# Altium PCB correctCore.PcbDoc (part 2 of 2)
Units mil, origin at the board's own origin, x right, y up, seen from the top; angles counter-clockwise.
Board outline 6000 x 4000 mil, 4 copper layers (Top Layer, Layer 1, Layer 2, Bottom Layer), stack 23.756 mil thick; 90 components, 166 nets, 637 pads, 374 vias.
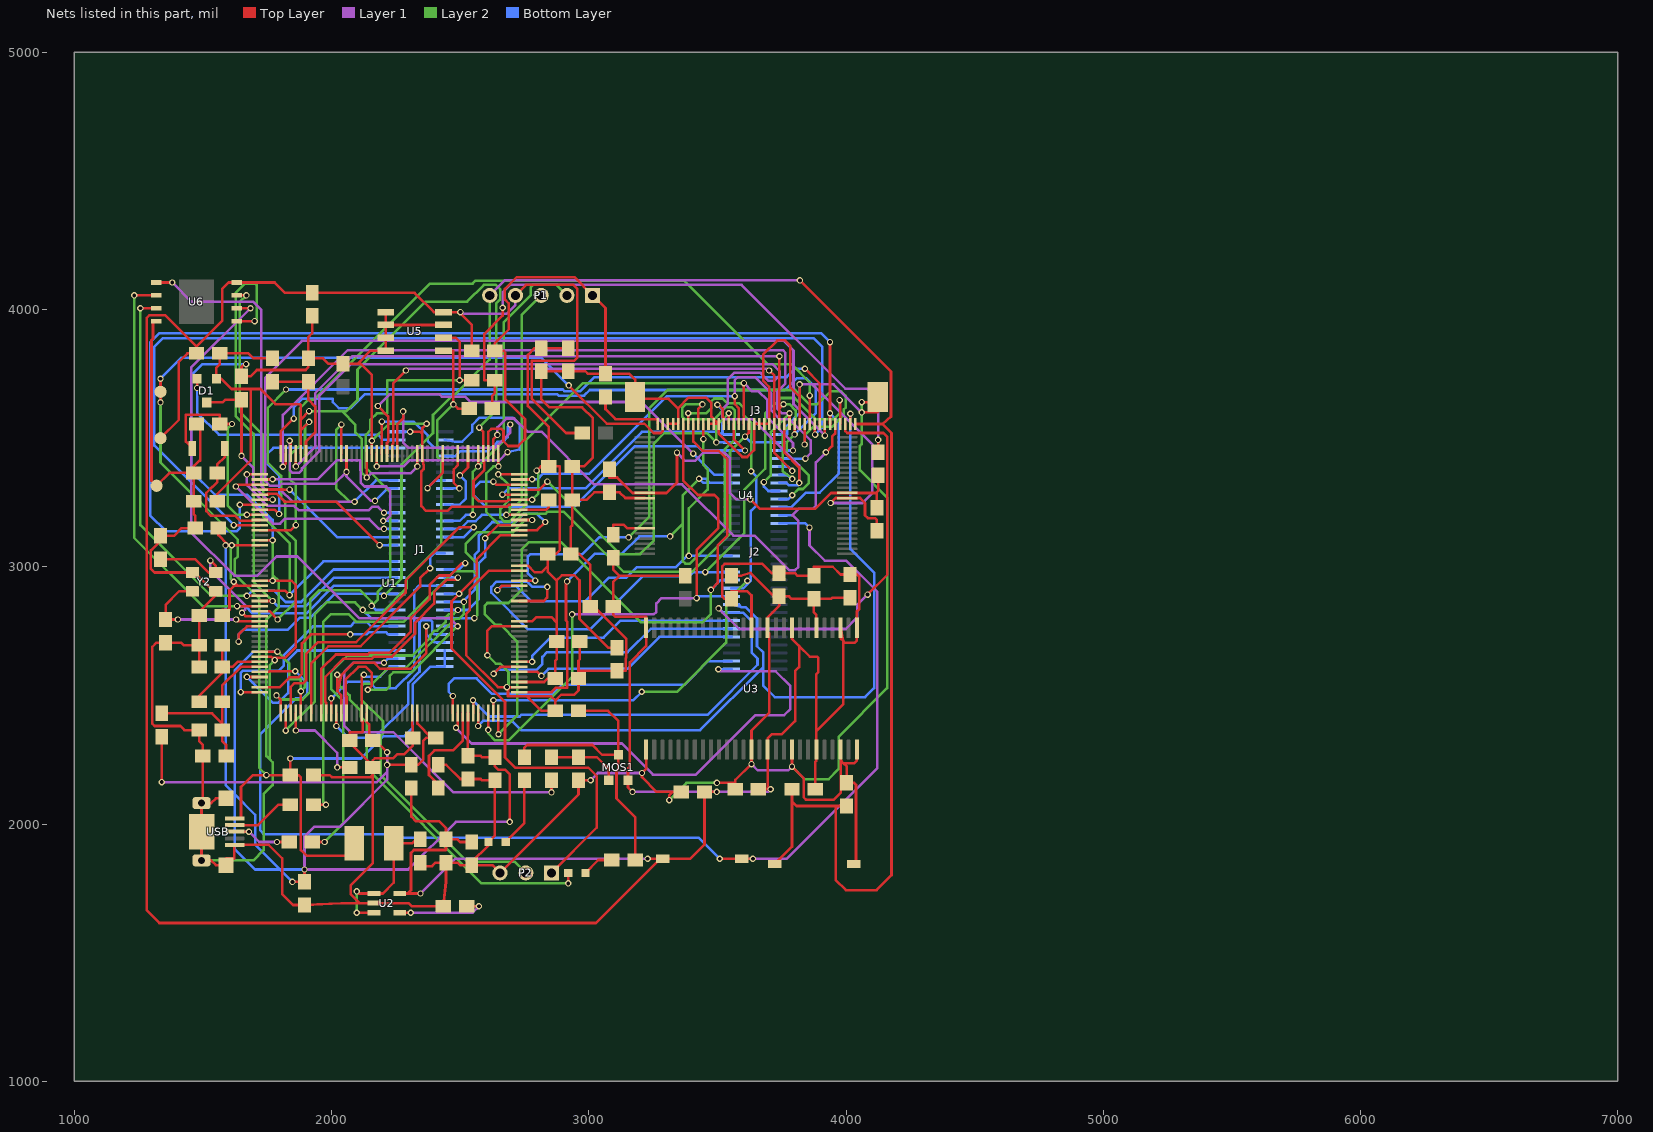
[diagram p4: the nets of this part, all layers, seen from the top]

## Via types
v1: diameter 25, hole 15, Top Layer to Bottom Layer, 374 vias

## Nets (pads, with @x,y where several pads share a name; then routed paths per layer and width w, separated by ;. In a path a pad name is that pad's centre, name@x,y a point inside that pad or via, vN(x,y) a via of type N, cw(c..) or ccw(c..) an arc to the next point about the centre after c; other vN are vias at no path point) (continued)
GND: C1.2 C2.1 C3.2 C4.1 C5.2 C6.1 C7.1 C8.1 C9.1 C10.1 C11.1 C12.2 C13.1 C14.1 C15.1 C16.1 C17.1 C18.1 C19.1 C20.1 C21.1 C22.1 C23.1 C24.1 C25.1 C26.1 C27.1 C28.1 C29.1 C30.1 C31.1 C32.1 C33.2 C34.2 C35.1 C36.1 C37.1 C38.1 C39.1 C40.1 C41.1 C42.1 C43.1 C44.2 C45.2 GND.1 J1.1 J1.30 J2.31 J3.3 J3.4 J3.5 J3.11 J3.12 J3.13 J3.20 J3.21 J3.22 J3.23 J3.29 J3.A J3.B P1.1 P2.3 PWR.2 R1.2 R4.2 R7.2 R14.1 RST.2 U1.14 U1.22 U1.37 U1.61 U1.71 U1.90 U1.102 U1.113 U1.126 U1.135 U1.148 U1.158 U2.2 U3.6 U3.12 U3.28 U3.41 U3.46 U3.52 U3.54 U4.13 U4.36 U5.1 U5.2 U5.3 U5.4 U5.7 U6.4 USB.5 USB.6 USB.7 USB.8 USB.9 Y2.2 Y2.4 | length 29148.7
  Top Layer w10: U6.4@1318.5,3955 1306,3955 1306,3887 1300,3881 1300,3335 GND.1@1320,3315 1370,3365 C9.1@1465,3365 ; C11.1@1334.94,3120 C11.1@1354,3120 ; C8.1@1475,3554.94 1475,3550.47 1489,3550.47 1489,3412 1485,3412 1465,3392 C9.1@1465,3365 ; C4.1@1485,2610.98 C2.1@1485,2695 ; USB.9@1590,2100 1550.78,2100 1532,2081.22 USB.6@1500,2081.22 ; v1(1668,3788) 1662,3788 1650,3776 C1.2@1650,3740 1685,3740 1710,3765 1899.06,3765 1910.06,3776 R4.2@1910.06,3810 ; U1.37@1720.91,2650.31 1765.54,2650.31 1769.85,2646 v1@1779,2646 ; U1.22@1720.91,2945.59 v1(1771,2945.59) 1844.41,2945.59 1861.28,2928.72 1861.28,2687.28 1820,2646 v1@1779,2646 ; U1.14@1720.91,3103.07 1770.93,3103.07 v1(1771,3103) ; v1(1779,2637) v1@1779,2646 ; C44.2@1925,3975 1925,3907.94 1910.06,3893 R4.2@1910.06,3810 ; C33.2@1930,2190 1993,2190 2001,2182 2152,2182 2160,2190 ; v1(2125.99,2580.33) 2117.19,2571.53 U1.61@2117.19,2431.2 2117.19,2399 2120.87,2399 2120.87,2389.13 2122,2388 2122,2359 2120,2357 2070,2357 C16.1@2070,2325 2070,2317 R1.2@2160,2227 ; U1.158@2156.56,3440.29 v1@2156.56,3489.56 ; v1(2157,3490) v1@2156.56,3489.56 ; U5.1@2210.59,3990 U5.2@2210.59,3940 ; v1(2305.41,3524.92) 2344,3524.92 2353.41,3515.52 ; U1.71@2314.04,2431.2 2314.04,2382.96 2315,2382 C17.1@2315,2335 2315,2304 2282,2271 2255,2271 2239.5,2255.5 2168,2255.5 2160,2247.5 R1.2@2160,2227 ; C29.1@2345,1850 2345,1836.5 2390.66,1836.5 2404.16,1850 C31.1@2445,1850 ; v1(2369.41,3556) 2353.41,3540 2353.41,3515.52 ; C3.2@2415.06,2230 2446,2230 2501,2175 C18.1@2530.06,2175 2580,2175 2585,2170 C19.1@2635,2170 2635,1955 PWR.2@2610,1930 2610,1917 2545,1852 C32.1@2545,1840 ; U5.7@2435,3940 U5.2@2210.59,3940 ; v1(2606,2656) 2606,2752 2622.42,2768.42 U1.102@2730,2768.42 ; U1.135@2609.31,3440.29 2609.31,3523.82 2621.5,3536 2660.5,3536 2668.5,3528 2668.5,3488 2687,3469.5 2725.5,3469.5 2752,3496 2752,3574 2676,3650 2676,3832 2668,3840 C45.2@2635,3840 2635,3869 2689,3923 2689,4023.68 2674,4038.68 2674,4080 2720,4126 2944,4126 P1.1@3015,4055 3064.94,4005.06 C28.1@3064.94,3750 ; v1(2682,2532) 2686,2528 v1@2686,2522.2 ; U1.90@2730,2532.2 2696,2532.2 ; U1.113@2730,2984.96 2612,2984.96 2538,2910.96 2538,2832 2523,2817 2523,2656 2646.8,2532.2 2696,2532.2 ; U1.126@2730,3240.87 2689.87,3240.87 2683,3234 2468,3234 2451,3217 2368,3217 2349,3236 2349,3371 2358,3380 2358,3397 2357,3398 2357,3410 2353.41,3410 U1.148@2353.41,3440.29 2353.41,3515.52 ; C21.1@2965,2710.06 2965,2640 2960,2635 2960,2595 ; C39.1@3005,2845 C39.1@3005,2861 ; v1(3007,2170) R14.1@2960,2170 2960,2115 P2.3@2655,1810 2625,1840 C32.1@2545,1840 ; U4.13@3217.6,3267.2 3142.17,3267.2 3120,3289.37 C36.1@3080,3289.37 3021.37,3289.37 2992,3260 C5.2@2935,3260 ; U3.28@3223.07,2290 3223.07,2214.23 v1(3207.07,2198.23) 3207.07,2181.93 3264,2125 3326,2125 ; J3.3@3307.95,3555.57 J3.4@3327.64,3555.57 J3.5@3347.32,3555.57 3347.32,3616 ; v1(3313,2093) 3313,2112 3326,2125 ; C38.1@3360,2125 3326,2125 ; J3.11@3465.43,3555.57 J3.12@3485.12,3555.57 J3.13@3504.8,3555.57 ; v1(3498,2160) 3569.53,2160 ; C40.1@3555,2965 3592,2965 3629.36,2976 3720.36,2885 C41.1@3740.04,2885 ; C37.1@3569.53,2135 3569.53,2160 ; U3.46@3790,2290 v1(3790,2223) 3835,2178 3835,2104 3844,2095 3953,2095 3978.98,2120.98 3978.98,2248 ; J3.29@3819.76,3555.57 3819.76,3661 ; v1(3819.76,3709) 3819.76,3661 ; U3.6@3884.49,2762.44 3884.49,2813 3875,2822.49 C42.1@3875,2875 ; v1(3940,3248) 3959.2,3267.2 U4.36@4005,3267.2 4054.8,3267.2 4074,3248 4074,3200 4085,3189 4112,3189 4120,3181 C35.1@4120,3140 ; U3.52@3978.98,2290 3978.98,2248 ; C43.1@4015.06,2880 3947,2880 3942,2875 C42.1@3875,2875 ; RST.2@4030,1845 4039,1845 4039,2152 4031,2160 C12.2@4002.09,2160 4002.09,2224.89 3990.98,2236 ; U3.54@4041.97,2290 4041.97,2245.97 4032,2236 3990.98,2236 ; v1(4061,3600) 4123.88,3600 J3.B@4123.88,3640 ; v1(4061,3640) J3.B@4123.88,3640 ; J3.B@4123.88,3660 J3.B@4123.88,3640 ; C11.1@1354,3120 1298,3064 1298,2991.83 1312,2977.83 Y2.4@1459.45,2977.83 1468,2977.83 1540.83,2905 Y2.2@1550,2905 1550,2890 1485,2825 C15.1@1485,2810 C2.1@1485,2695 ; C11.1@1354,3120 1387,3120 1417,3150 C14.1@1470,3150 1470,3199 1464.94,3204.06 C13.1@1464.94,3254.94 1464.94,3309 1465,3309.06 C9.1@1465,3365 ; C2.1@1485,2695 1425,2695 1415,2705 C10.1@1355,2705 1320,2705 1303,2688 1303,2390 1312,2381 1412,2381 1428,2365 C7.1@1485,2365 1485,2322 1500,2307 C6.1@1500,2265 USB.6@1500,2081.22 ; USB.6@1500,2081.22 USB.6@1494.65,2081.22 1494.65,2025.35 1495,2025 USB.9@1495,1970 1495,1914.35 1494.65,1914 USB.7@1494.65,1858.78 1532,1858.78 1550.78,1840 USB.8@1590,1840 1590,1866 1622,1866 1622,1918.82 USB.5@1624,1918.82 1756,1918.82 1808,1866.82 1808,1728 1851,1685 C27.1@1895,1685 2037.4,1692.4 2109.6,1692.4 ; R4.2@1910.06,3810 1967,3810 1987,3790 R7.2@2045.06,3790 2102,3790 ; 2102,3790 2112,3790 2156.5,3745.5 2156.5,3517.5 2156.56,3517.44 v1@2156.56,3489.56 ; 2102,3790 2152,3840 U5.4@2210.59,3840 U5.3@2210.59,3890 U5.2@2210.59,3940 ; 2109.6,1692.4 U2.2@2165,1692.4 2300,1692.4 2312.4,1680 C30.1@2435,1680 2445,1775 C31.1@2445,1850 ; 2109.6,1692.4 2074,1728 2074,1761 2160,1847 2160,2190 ; 2160,2190 R1.2@2160,2220 R1.2@2160,2227 ; C31.1@2445,1850 2490,1850 2500,1840 C32.1@2545,1840 ; v1@2686,2522.2 2696,2532.2 ; v1@2686,2522.2 2686,2496 2760,2496 ; 2760,2496 2854,2496 2870,2480 ; 2760,2496 2816,2440 C34.2@2870,2440 2870,2480 ; 2870,2480 2893,2503 2944,2503 2960,2519 C20.1@2960,2565 2960,2595 ; C5.2@2935,3260 C23.1@2935,3390.06 2982.06,3390.06 3016,3424 3016,3578 2974,3620 2848,3620 2815.06,3652.94 C25.1@2815.06,3760 C24.1@2920,3760 2987,3760 2997,3750 C28.1@3064.94,3750 ; C5.2@2935,3260 2935,3160 2930,3155 C22.1@2930,3050 2963,3050 3005,3008 C39.1@3005,2861 ; 2960,2595 C26.1@3110,2595 3143,2595 3143,2644 3146,2647 3146,2720 C39.1@3005,2861 ; C28.1@3064.94,3750 3158,3750 3180,3728 J3.A@3180,3660 3180,3653 3310.32,3653 3347.32,3616 ; 3347.32,3616 3388.46,3657.14 3456,3657.14 3476.5,3636.64 3476.5,3584 3497.59,3562.91 3504.8,3562.91 J3.13@3504.8,3555.57 ; J3.13@3504.8,3555.57 3504.8,3518.7 3596.9,3426.6 3616,3426.6 3642.6,3453.2 J3.20@3642.6,3555.57 J3.21@3662.28,3555.57 J3.22@3681.97,3555.57 J3.23@3701.65,3555.57 3701.65,3699.35 3677.5,3723.5 3677.5,3824.5 3733,3880 3763,3880 3784,3859 3784,3696.76 3819.76,3661 ; 3569.53,2160 3569.53,2171 v1(3632.52,2233) U3.41@3632.52,2290 3632.52,2363 3701.5,2431.98 3701.5,2741.27 3695.51,2741.27 U3.12@3695.51,2762.44 3695.51,2803.47 3740.04,2848 C41.1@3740.04,2885 ; C41.1@3740.04,2885 3778.99,2885 3788.99,2875 C42.1@3875,2875 ; 3978.98,2248 3990.98,2236
  Layer 1 w10: v1(3007,2170) 3035.23,2198.23 v1(3207.07,2198.23) ; v1(3632.52,2233) 3656.52,2209 3776,2209 v1(3790,2223) ; v1(3819.76,3709) 3869,3709 ; v1(3940,3248) 4064,3248 4101.5,3285.5 4101.5,3476.5 3869,3709 ; v1(4061,3600) 3952,3709 3869,3709
  Layer 2 w10: USB.7@1494.65,1858.78 1696,1858.78 1736,1898.78 1736,2116 1771,2151 1771,2240 1759,2252 ; v1(1771,2945.59) 1771,2968 ; v1(1771,3103) 1771,2968 ; v1(1779,2637) 1759,2617 1759,2252 ; v1(2157,3490) 2223,3556 v1(2369.41,3556) ; v1(2606,2656) 2639,2623 2656,2623 2688,2591 2688,2538 v1(2682,2532) ; v1(3313,2093) 3380,2160 v1(3498,2160) ; v1(3790,2223) 3839,2174 3932,2174 3971,2213 3971,2339 4160,2528 4160,3270 4054,3376 4054,3470 4061,3477 v1(4061,3600) v1(4061,3640) ; 1759,2252 1747,2264 1747,2795 1795,2843 1795,2944 1771,2968
  Bottom Layer w10: v1(1668,3788) 1498,3788 1454,3744 1454,3373 1547,3280 1673,3280 1771,3182 v1(1771,3103) ; v1(2125.99,2580.33) 2133.19,2573.14 2189.1,2573.14 2227.5,2611.54 J1.1@2254.96,2611.54 ; J1.30@2254.96,3524.92 v1(2305.41,3524.92) ; J2.31@3740.04,3514.92 3770.76,3514.92 3770.76,3548 3819.76,3597 v1(3819.76,3709)
IIC_SCL: J1.8 R20.1 U1.45 U5.6 | length 2530.7
  Top Layer w10: v1(1786,2500) 1802.22,2483.78 U1.45@1802.22,2431.2 ; U5.6@2435,3890 2483,3890 2498,3875 v1(2498,3725) R20.1@2545,3725
  Layer 2 w10: v1(1786,2500) 1802,2484 1888,2484 1917,2513 1917,2873 1952,2908 2112,2908 2156,2864.01 v1(2156,2848.01) 2180,2872.01 2180,2903 2228,2951 2228,3290 2133,3385 2133,3513 2151.22,3531.22 2151.22,3571.72 2176,3596.5 2216.5,3596.5 2216.5,3725 v1(2498,3725)
  Bottom Layer w10: v1(2156,2848.01) 2172,2832.01 J1.8@2254.96,2832.01
IIC_SDA: J1.7 R21.1 U1.46 U5.5 | length 2266.7
  Top Layer w10: v1(1821.91,2362.91) U1.46@1821.91,2431.2 ; U5.5@2435,3840 2474,3840 v1@2474,3632 ; v1(2474,3631) v1@2474,3632 ; R21.1@2535,3615 2491,3615 v1@2474,3632
  Layer 2 w10: v1(1821.91,2362.91) 1935.58,2476.58 1935.58,2816 1981.28,2861.7 2091.91,2861.7 v1(2121.1,2832.51) 2132.62,2821 2195.91,2821 2291.79,2916.88 2291.79,2952 2426,3086.21 2426,3413 2410.5,3428.5 2410.5,3569 2472.5,3631 v1(2474,3631)
  Bottom Layer w10: v1(2121.1,2832.51) 2153.1,2800.51 J1.7@2254.96,2800.51
JTCK: J1.42 P1.2 U1.137 | length 1308
  Top Layer w10: U1.137@2569.94,3440.29 2569.94,3390.06 v1(2570,3390)
  Layer 2 w10: v1(2549.36,3201.96) 2549.36,3369.36 v1(2570,3390) 2669,3489 2669,3950 2774,4055 2774,4085.53 2784,4095.53 2874.47,4095.53 P1.2@2915,4055
  Bottom Layer w10: J1.42@2440,3178.47 2498.47,3178.47 2521.96,3201.96 v1(2549.36,3201.96)
JTMS: J1.43 P1.3 U1.124 | length 1231.9
  Top Layer w10: v1(2680.02,3201.5) U1.124@2730,3201.5
  Layer 2 w10: v1(2680.02,3201.5) 2693.58,3215.05 2693.58,3232 2703.8,3242.22 2720.74,3242.22 2740,3261.48 2740,3980 P1.3@2815,4055
  Bottom Layer w10: J1.43@2440,3146.97 2500.44,3146.97 2530.47,3177 2560,3177 2584.5,3201.5 v1(2680.02,3201.5)
KEY0: J1.6 U1.44 | length 868
  Top Layer w10: v1(1647,2513) 1647.48,2512.52 U1.44@1720.91,2512.52
  Bottom Layer w10: v1(1647,2513) 1647,2587 1656,2596 1795,2596 1813.78,2614.78 1813.78,2655.22 1927.06,2768.5 2074.03,2768.5 2090.03,2784.5 2137.03,2784.5 2152.51,2769.02 J1.6@2254.96,2769.02
KEY1: J1.5 U1.43 | length 695.6
  Top Layer w10: U1.43@1720.91,2532.2 1799,2532.2 1836.57,2569.77 1872,2569.77 1885,2582.77 1885,2702 1920,2737 v1(2073,2737)
  Bottom Layer w10: v1(2073,2737) 2136.54,2737 2145.06,2745.52 2211.5,2745.52 2219.5,2737.52 J1.5@2254.96,2737.52
KEY2: J1.28 U1.8 | length 846.8
  Top Layer w10: U1.8@1720.91,3221.18 1780,3221.18 v1(1796,3205.18)
  Bottom Layer w10: v1(1796,3205.18) 1796,3353.77 1752,3397.77 1752,3440 1773.93,3461.93 J1.28@2254.96,3461.93
LCD_B3: J2.35 J3.24 U1.154 | length 2247.2
  Top Layer w10: U1.154@2235.3,3440.29 2235.3,3475 2240.14,3479.84 2240.14,3714.14 v1(2289,3763) ; v1(3701,3763) 3721.34,3742.66 J3.24@3721.34,3555.57 3721.34,3442.6 v1(3791,3372.94)
  Layer 1 w10: v1(2289,3763) 2295.42,3769.42 3694.58,3769.42 v1(3701,3763)
  Bottom Layer w10: J2.35@3740.04,3388.94 3775,3388.94 v1(3791,3372.94)
LCD_B4: J2.36 J3.25 U1.173 | length 2933
  Top Layer w10: v1(1861.28,3390.28) U1.173@1861.28,3440.29 ; J3.25@3741.02,3555.57 3741.02,3616.02 ; v1(3741.02,3818.5) 3741.02,3616.02 ; v1(3757,3632) 3741.02,3616.02
  Layer 1 w10: v1(1861.28,3390.28) 1936.5,3465.5 1936.5,3674.5 2080.5,3818.5 v1(3741.02,3818.5)
  Layer 2 w10: v1(3757,3632) 3780.2,3632 3804,3608.2 3804,3571 3754,3521 3754,3371.44 3783,3349.44 v1(3791,3341.44)
  Bottom Layer w10: J2.36@3740.04,3357.44 3767.5,3357.44 v1(3791,3341.44)
LCD_B5: J2.37 J3.26 U1.174 | length 3582.8
  Top Layer w10: v1(1837,3490) 1841.6,3485.4 U1.174@1841.6,3440.29 ; J3.26@3760.71,3555.57 3760.71,3443.29 3818,3386 v1(3818,3326)
  Layer 1 w10: v1(1837,3490) 1837,3376 1847,3366 1875,3366 1885,3376 1885,3382 1952.5,3449.5 1952.5,3666 2073,3786.5 3715.5,3786.5 3742,3760 3742,3744 3721,3723 3698,3723 3667.58,3753.42 3565.42,3753.42 3540,3728 3540,3633 3520,3613 3520,3581 3528,3573 3639,3573 3818,3394 v1(3818,3326)
  Bottom Layer w10: J2.37@3740.04,3325.94 3768,3325.94 3776.94,3317 3815,3317 3815,3326 v1(3818,3326)
LCD_B6: J2.38 J3.27 U1.175 | length 3037.8
  Top Layer w10: v1(1811,3389) 1821.91,3399.91 U1.175@1821.91,3440.29 ; J3.27@3780.39,3555.57 v1(3780.39,3596.7)
  Layer 1 w10: v1(1811,3389) 1811,3590 2063,3842 3754.52,3842 3764.52,3832 3764.52,3712.52 3733,3681 3733,3614 3750.3,3596.7 v1(3780.39,3596.7)
  Layer 2 w10: v1(3681,3329) 3708,3356 3708,3524.3 v1(3780.39,3596.7)
  Bottom Layer w10: v1(3681,3329) 3681,3312 3698.55,3294.45 J2.38@3740.04,3294.45
LCD_B7: J2.39 J3.28 U1.176 | length 2970.2
  Top Layer w10: U1.176@1802.22,3440.29 1802.22,3525.22 v1(1853,3576) ; v1(3800.08,3514.45) J3.28@3800.08,3555.57
  Layer 2 w10: v1(3791,3278) 3815.44,3302.44 3832.46,3302.44 3856,3325.99 3856,3354 3770,3440 3770,3484.37 v1(3800.08,3514.45)
  Bottom Layer w10: v1(1853,3576) 1853,3619.05 1887.45,3653.5 2004.79,3653.5 2004.79,3640.13 2028.03,3616.89 2075.11,3616.89 2129.32,3671.09 2876.91,3671.09 2882.5,3665.5 2982.25,3665.5 3003.84,3687.09 3762.59,3687.09 3808,3732.5 3846.22,3732.5 3883,3695.72 3883,3597.37 v1(3800.08,3514.45) ; J2.39@3740.04,3262.95 3775.95,3262.95 v1(3791,3278)
LCD_BL: J1.23 J3.34 U1.163 | length 3648.4
  Top Layer w10: v1(2058.13,3369) U1.163@2058.13,3440.29 ; v1(3918.19,3510) J3.34@3918.19,3555.57
  Layer 1 w10: v1(2169,3256) 2153,3256 2058.13,3350.87 v1(2058.13,3369) 2012.55,3323.42 1806.7,3323.42 1798.28,3315 1760,3315 1742.43,3332.57 1742.43,3735.43 1885,3878 3758,3878 3796,3840 3796,3632.19 v1(3918.19,3510)
  Bottom Layer w10: v1(2169,3256) 2217.45,3304.45 J1.23@2254.96,3304.45
LCD_CLK: J3.30 U1.111 | length 2348
  Top Layer w10: U1.111@2730,2945.59 2791.59,2945.59 v1(2792,2946) ; v1(3839,3475.41) 3839.45,3475.86 J3.30@3839.45,3555.57
  Layer 2 w10: v1(3155,3114) 3235,3194 3235,3616 3306.09,3687.09 3801.91,3687.09 3857,3632 3889,3632 3939,3682 3981,3682 3999,3664 3999,3619 3991,3611 3991,3589.37 3945.63,3544 3872,3544 3839,3511 v1(3839,3475.41)
  Bottom Layer w10: v1(2792,2946) 2763.5,2974.5 2763.5,3040 2772,3048.5 2974.5,3048.5 3040,3114 v1(3155,3114)
LCD_DE: J3.33 U1.28 | length 3376.2
  Top Layer w10: U1.28@1720.91,2827.48 1758,2827.48 v1(1790.48,2795) ; v1(3840,3770) 3898.5,3711.5 J3.33@3898.5,3555.57
  Layer 2 w10: v1(1790.48,2795) 1861,2865.52 1861,3100 1820,3141 1820,3253 1804,3269 1804,3353 1752,3405 1752,3618 v1(1823,3689)
  Bottom Layer w10: v1(1823,3689) 2899,3689 2906.5,3681.5 2966,3681.5 3021.92,3737.42 3769.18,3737.42 3801.76,3770 v1(3840,3770)
LCD_G2: J2.30 J3.14 U1.128 | length 1272.5
  Top Layer w10: v1(2664,3280.24) U1.128@2730,3280.24 ; v1(3500,3630) 3504,3630 3520.67,3613.33 3520.67,3582.82 3524.49,3579 J3.14@3524.49,3555.57
  Bottom Layer w10: v1(2664,3280.24) 2688.76,3305 2986.9,3305 3206.52,3524.62 3505.3,3524.62 3515,3514.92 3520,3514.92 ; v1(3500,3630) 3520,3610 3520,3514.92 ; J2.30@3555,3514.92 3520,3514.92
LCD_G3: J2.29 J3.15 U1.129 | length 1559.7
  Top Layer w10: U1.129@2730,3299.92 2807.92,3299.92 v1(2839,3331) ; J3.15@3544.17,3555.57 v1(3544.17,3596.7)
  Layer 2 w10: v1(2839,3331) 3121,3049 3200,3049 3252,3101 3252,3478 3293.5,3519.5 3459.93,3519.5 v1(3496,3483.43) 3496,3548.52 v1(3544.17,3596.7)
  Bottom Layer w10: v1(3496,3483.43) J2.29@3555,3483.43
LCD_G4: J2.28 J3.16 U1.130 | length 1516.9
  Top Layer w10: v1(2629,3331) 2640.39,3319.61 U1.130@2730,3319.61 ; J3.16@3563.86,3555.57 3563.86,3495.51 v1(3607.44,3451.93)
  Bottom Layer w10: v1(2629,3331) 2579.5,3331 2552.5,3304 2552.5,3280 2598.5,3234 2944,3234 3178.33,3468.33 3424.67,3468.33 3441.07,3451.93 J2.28@3555,3451.93 v1(3607.44,3451.93)
LCD_G5: J2.34 J3.17 U1.131 | length 1770.6
  Top Layer w10: U1.131@2730,3339.29 2779.29,3339.29 v1(2780,3340) ; v1(3567.54,3663.59) 3567.54,3632.05 3583.54,3616.05 J3.17@3583.54,3555.57
  Layer 1 w10: v1(3567.54,3663.59) 3567.54,3725.23 3579.73,3737.42 3645.58,3737.42 3710,3673 3710,3607 3744,3573 3781,3573 3863,3491 3863,3441.43 v1(3842,3420.43)
  Bottom Layer w10: v1(2780,3340) 2800,3340 2821,3361 3001,3361 3303.59,3663.59 v1(3567.54,3663.59) ; J2.34@3740.04,3420.43 v1(3842,3420.43)
LCD_G6: J2.33 J3.18 U1.132 | length 2171.4
  Top Layer w10: v1(2648,3358.98) U1.132@2730,3358.98 ; J3.18@3603.23,3555.57 v1(3603.23,3713.92)
  Layer 1 w10: v1(3603.23,3713.92) 3635.23,3681.92 3660.08,3681.92 3694,3648 3694,3580.95 3794,3480.95 v1(3794,3451.93)
  Layer 2 w10: v1(2648,3358.98) 2687.5,3319.48 2687.5,3256.59 2656,3225.09 2656,3191 2671,3176 2692.48,3176 2756,3239.52 2756,3492.07 2977.85,3713.92 v1(3603.23,3713.92)
  Bottom Layer w10: J2.33@3740.04,3451.93 v1(3794,3451.93)
LCD_G7: J2.32 J3.19 U1.133 | length 2009.9
  Top Layer w10: U1.133@2648.68,3440.29 2648.68,3390.32 v1(2649,3390) ; v1(3607.44,3506.23) 3622.91,3521.7 J3.19@3622.91,3555.57
  Layer 2 w10: v1(2649,3390) 2628.84,3390 2601.5,3362.66 2601.5,3213.5 2656,3159 2698.11,3159 2745.11,3206 2831.86,3206 2840.06,3214.2 2901.8,3214.2 3136,2980 3401,2980 3549,3128 3549,3447.79 v1(3607.44,3506.23)
  Bottom Layer w10: v1(3607.44,3506.23) 3630.25,3483.43 J2.32@3740.04,3483.43
LCD_HSYNC: J3.31 U1.12 | length 3141.5
  Top Layer w10: U1.12@1720.91,3142.44 1748.39,3142.44 1748.39,3142.5 1841.78,3142.5 v1(1861.28,3162) ; J3.31@3859.13,3555.57 v1(3859.13,3665.38)
  Layer 2 w10: v1(1861.28,3162) 1861.28,3317.72 1837,3342 1837,3432 1876.5,3471.5 1876.5,3616 1910.49,3649.99 1930.99,3649.99 2382,4101 2547.94,4101 2558.47,4111.53 3372.54,4111.53 3697.57,3786.5 3789.26,3786.5 3859.13,3716.63 v1(3859.13,3665.38)
LCD_R3: J2.10 J3.6 U1.86 | length 2235.9
  Top Layer w10: v1(2609.31,2366) U1.86@2609.31,2431.2 ; J3.6@3367.01,3555.57 3367.01,3335.99 3424,3279 3488,3279 3504,3263 3504,3151 3419,3066 v1(3419,2878)
  Layer 1 w10: v1(2935,2815) 3252.53,2815 3262.56,2825.03 3262.56,2857.56 3283,2878 v1(3419,2878)
  Layer 2 w10: v1(2609.31,2366) 2609.31,2352.19 2636,2325.5 2688.5,2325.5 2935,2572 v1(2935,2815)
  Bottom Layer w10: v1(3419,2878) 3426,2885 J2.10@3555,2885
LCD_R4: J2.11 J3.7 U1.87 | length 2435.7
  Top Layer w10: U1.87@2629,2431.2 v1(2629,2480.99) ; J3.7@3386.69,3555.57 3386.69,3596.69 v1(3387,3597)
  Layer 2 w10: v1(3206,2514) 3343,2514 3534,2705 3534,2863.09 v1(3616.79,2945.89) ; v1(3387,3597) 3457,3597 3476,3616 3476,3642 3488,3654 3520,3654 3537.8,3636.2 3584,3636.2 3602.98,3617.21 3602.98,3588.02 3631,3560 v1(3631,3371.5)
  Bottom Layer w10: v1(2629,2480.99) 2629.51,2481.5 3173.5,2481.5 v1(3206,2514) ; J2.11@3555,2916.5 3601,2916.5 3616.79,2932.29 ; v1(3616.79,2945.89) 3616.79,2932.29 ; v1(3631,3371.5) 3651.5,3351 3651.5,3238.33 3630.5,3217.33 3630.5,2946 3616.79,2932.29
LCD_R5: J2.12 J3.8 U1.88 | length 2846.2
  Top Layer w10: U1.88@2648.68,2431.2 2648.68,2349.32 v1(2649,2349) ; J3.8@3406.38,3555.57 3406.38,3486.62 3442,3451 3505,3451 3539,3417 3539,3121 3501,3083 3501,2935.99 v1(3475,2909.99)
  Layer 2 w10: v1(2649,2349) 2721.5,2421.5 2721.5,2709.5 2656,2775 2636,2775 2595,2816 2595,2848 2606,2859 2688,2859 2738.75,2909.75 2738.75,3067.25 2767,3095.5 2891.9,3095.5 3203.4,2784 3443,2784 3475,2816 v1(3475,2909.99)
  Bottom Layer w10: v1(3475,2909.99) 3513,2947.99 J2.12@3555,2947.99
LCD_R6: J2.24 J3.9 U1.89 | length 2925.7
  Top Layer w10: U1.89@2730,2512.52 2855,2512.52 2871.48,2529 2916,2529 2916,2787 2911.5,2791.5 2911.5,2938.5 v1(2916,2943) ; J3.9@3426.06,3555.57 3426.06,3615.06 v1(3442,3631)
  Layer 2 w10: v1(3316,3118) 3364.87,3166.87 3364.87,3277.64 3365,3277.78 ; v1(3429.17,3341.94) 3365,3277.78 ; v1(3442,3631) 3376,3631 3363,3618 3363,3584 3374,3573 3487,3573 3534.2,3620.2 3555.48,3620.2 3567.67,3608 3567.67,3495 3528,3455.33 3528,3147 3393,3012 3376,3012 3365,3023 3365,3277.78
  Bottom Layer w10: v1(2916,2943) 3024,3051 3130.1,3051 3197.1,3118 v1(3316,3118) ; J2.24@3555,3325.94 3472.04,3325.94 ; 3472.04,3325.94 3445.17,3325.94 v1(3429.17,3341.94) 3456.04,3341.94 3472.04,3325.94
LCD_R7: J2.15 J3.10 U1.110 | length 1657.4
  Top Layer w10: v1(2645,2909) 2661.91,2925.91 U1.110@2730,2925.91 ; v1(3445.75,3496) J3.10@3445.75,3555.57
  Layer 2 w10: v1(3389,3042) 3389,3227.5 3462,3300.5 3462,3379 3445,3396 3445,3495.25 v1(3445.75,3496)
  Bottom Layer w10: v1(2645,2909) 2661,2925 2717.1,2925 2775.38,2866.72 2988.2,2866.72 3079,2957.52 3146.52,2957.52 3187.53,2998.53 3338.47,2998.53 3382.42,3042.48 v1@3389.48,3042.48 ; v1(3389,3042) v1@3389.48,3042.48 ; J2.15@3555,3042.48 v1@3389.48,3042.48
LCD_VSYNC: J3.32 U1.11 | length 3941.4
  Top Layer w10: v1(1620,3162.13) U1.11@1720.91,3162.13 ; J3.32@3878.82,3555.57 3878.82,3515.18 v1(3880,3514)
  Bottom Layer w10: v1(1620,3162.13) 1311,3471.13 1311,3856 1344,3889 3874,3889 3907,3856 3907,3541 v1(3880,3514)
LED0: DS0.2 J1.57 U1.57 | length 2250.8
  Top Layer w10: v1(2022.45,2580.08) 2022.45,2516.08 ; U1.57@2038.45,2431.2 2038.45,2500.08 2022.45,2516.08 ; v1(2368,2769) 2368,2663.61 2307.89,2603.5 2188.03,2603.5 2164.49,2627.03 2087.05,2627.03 2038.45,2578.43 2037.85,2576.12 2022.45,2516.08 ; v1(2920,1769) DS0.2@2920,1810
  Layer 2 w10: v1(2022.45,2580.08) 2032,2570.52 2032,2532.08 2038.45,2532.08 2070.68,2499.84 2070.68,2483.84 2113.43,2441.09 2113.43,2417.52 2137,2393.96 2137,2215.17 2583.17,1769 v1(2920,1769)
  Bottom Layer w10: v1(2368,2769) 2368,2738.02 2400,2706.02 J1.57@2440,2706.02
LED1: J1.56 U1.56 | length 885.7
  Top Layer w10: v1(2018.76,2381) U1.56@2018.76,2431.2
  Bottom Layer w10: v1(2018.76,2381) 2063.76,2336 2167.5,2336 2298.5,2467 2298.5,2548.87 2342,2592.37 2342,2784 2351,2793 2384,2793 2392,2785 2392,2745.52 2400,2737.52 J1.56@2440,2737.52
NetC1_1: C1.1 D1.3 U1.6 | length 641.4
  Top Layer w10: D1.3@1515,3638.74 1576,3638.74 1587.26,3650 C1.1@1650,3650 v1(1650,3431) ; U1.6@1720.91,3260.55 1770.55,3260.55 v1(1771,3261)
  Layer 1 w10: v1(1650,3431) 1695,3386 1695,3316 1750,3261 v1(1771,3261)
NetC2_2: C2.2 C4.2 R2.1 U1.38 | length 411.3
  Top Layer w10: R2.1@1485,2475 1485,2497 1575,2587 C4.2@1575,2610.98 ; C2.2@1575,2695 C4.2@1575,2610.98 ; U1.38@1720.91,2630.63 1634.98,2630.63 1615.33,2610.98 C4.2@1575,2610.98
NetC3_1: C3.1 U1.81 | length 402.9
  Top Layer w10: C3.1@2415.06,2140 2415.06,2154.23 2379,2190.29 2379,2265 2400,2286 2472,2286 2510.89,2324.89 U1.81@2510.89,2431.2
NetC5_1: C5.1 U1.125 | length 147.5
  Top Layer w10: U1.125@2730,3221.18 2834.18,3221.18 2845,3232 C5.1@2845,3260
NetC8_2: C8.2 U1.9 Y1.1 | length 820.5
  Top Layer w10: Y1.1@1459.02,3460 1459.02,3461.97 1434,3486.98 1434,3591 1565,3591 C8.2@1565,3555 ; C8.2@1565,3554.94 C8.2@1565,3555 ; v1(1613,3555) C8.2@1565,3555 ; v1(1671,3202) 1671.5,3201.5 U1.9@1720.91,3201.5
  Layer 2 w10: v1(1613,3555) 1596,3538 1596,3238 1632,3202 v1(1671,3202)
NetC9_2: C9.2 U1.10 Y1.2 | length 499.2
  Top Layer w10: Y1.2@1585,3460 1585,3427 1555,3397 C9.2@1555,3365 1555,3328 1537,3310 1536,3310 1513,3287 1513,3216 1530,3199 1625.5,3199 1646,3178.5 1691.69,3178.5 1695,3181.81 U1.10@1720.91,3181.81
NetC10_2: C10.2 U1.30 Y2.1 | length 552.2
  Top Layer w10: v1(1403,2795) C10.2@1355,2795 1355,2852 1408,2905 Y2.1@1459.45,2905 ; v1(1629.22,2795) 1636.11,2788.11 U1.30@1720.91,2788.11
  Layer 1 w10: v1(1403,2795) v1(1629.22,2795)
NetC11_2: C11.2 U1.29 Y2.3 | length 629.8
  Top Layer w10: C11.2@1334.94,3030 1470,3030 1522.17,2977.83 Y2.3@1550,2977.83 1550,3003 v1(1529,3024) ; v1(1651.98,2820.98) 1665.16,2807.79 U1.29@1720.91,2807.79
  Layer 1 w10: v1(1529,3024) 1529,2986 1664,2851 1664,2833 v1(1651.98,2820.98)
NetC28_2: C28.2 J3.1 | length 285.3
  Top Layer w10: C28.2@3064.94,3660 3064.94,3613 3103.74,3574.2 3268.58,3574.2 J3.1@3268.58,3555.57
NetC29_2: C29.2 F1.2 U2.1 U2.3 | length 577.3
  Top Layer w10: v1(2098,1655) U2.3@2165,1655 ; v1(2098,1738) 2106.2,1729.8 U2.1@2165,1729.8 2200,1729.8 2241.77,1771.58 F1.2@2241.77,1925 2312.95,1925 2327.95,1940 C29.2@2345,1940
  Layer 2 w10: v1(2098,1655) v1(2098,1738)
NetC30_2: C30.2 U2.4 | length 366.4
  Top Layer w10: U2.4@2265,1655 v1(2308,1655) ; C30.2@2525,1680 v1(2573,1680)
  Layer 1 w10: v1(2308,1655) 2548,1655 v1(2573,1680)
NetC35_2: C35.2 C36.2 R16.1 U4.12 U4.37 | length 1580.7
  Top Layer w10: C36.2@3080,3379.37 3080,3347 3110,3347 3170.11,3286.89 U4.12@3217.6,3286.89 3301.89,3286.89 3343,3328 v1(3343,3444) ; v1(3628,3262) 3664,3226 3881,3226 3941.89,3286.89 U4.37@4005,3286.89 4116.11,3286.89 4120,3283 ; C35.2@4120,3230 4120,3283 ; R16.1@4125,3355 4125,3295 4120,3290 4120,3283
  Layer 1 w10: v1(3343,3444) 3375,3412 3413,3412 3445,3444 3528,3444 3548,3424 3548,3288 3574,3262 v1(3628,3262)
NetDS0_1: DS0.1 R10.2 | length 123.8
  Top Layer w10: DS0.1@2986.93,1810 3036.93,1860 R10.2@3090,1860
NetMOS1_1: MOS1.1 R13.2 R14.2 | length 284.5
  Top Layer w10: R13.2@2855,2260 R14.2@2960,2260 3031,2260 3077.6,2213.4 MOS1.1@3077.6,2170.79
NetPWR_1: PWR.1 R15.1 | length 270.3
  Top Layer w10: PWR.1@2676.93,1930 2750,2003.07 R15.1@2750,2170
NetR1_1: R1.1 U1.48 | length 369.2
  Top Layer w10: v1(1861.28,2363.5) U1.48@1861.28,2431.2 ; v1(2022,2220) R1.1@2070,2220
  Layer 1 w10: v1(1861.28,2363.5) 1935.5,2363.5 2022,2277 v1(2022,2220)
NetR4_1: R4.1 R5.1 U1.171 | length 445.6
  Top Layer w10: R5.1@1770,3720 R4.1@1910.06,3720 1910.06,3649.99 1936.5,3623.56 1936.5,3522.54 1900.65,3486.69 U1.171@1900.65,3440.29
NetR11_2: R11.2 USB.3 | length 227.6
  Top Layer w10: USB.3@1624,1970 v1(1679,1970) ; v1(1788,1930) R11.2@1835,1930
  Layer 1 w10: v1(1679,1970) 1719,1930 v1(1788,1930)
NetR12_2: R12.2 USB.2 | length 248.9
  Top Layer w10: USB.2@1624,1995.59 1715,1995.59 1794.41,2075 R12.2@1840,2075
NetR18_1: R18.1 U4.19 | length 167.8
  Top Layer w10: R18.1@3095,3125 3095,3164 3135.09,3164 3150,3149.09 U4.19@3217.6,3149.09
NRF_CE: J2.25 U1.155 | length 1726.2
  Top Layer w10: v1(2180,3625) 2220,3585 2220,3486 2215.61,3481.61 U1.155@2215.61,3440.29
  Layer 1 w10: v1(2180,3625) 2225,3670 2419.75,3670 2428.5,3661.25 2518.75,3661.25 2539.5,3640.5 3205.5,3640.5 v1(3406,3440)
  Bottom Layer w10: v1(3406,3440) 3488.56,3357.44 J2.25@3555,3357.44
NRF_CS: J1.34 U1.153 | length 1102.4
  Top Layer w10: U1.153@2254.98,3440.29 2256.14,3468.93 2256.14,3554.65 2278.48,3577 v1(2278.48,3604)
  Layer 1 w10: v1(2278.48,3604) 2278.48,3483.52 2299.5,3462.5 2635,3462.5 2695,3522.5 v1(2695,3553)
  Bottom Layer w10: J1.34@2440,3430.43 2481.95,3430.43 2501.25,3449.73 2608.73,3449.73 2644.5,3485.5 2666,3485.5 2684.5,3504 2684.5,3542.5 v1(2695,3553)
PA0: J2.42 U1.40 WKUP.1 | length 4677.1
  Top Layer w10: U1.40@1720.91,2591.26 1756.26,2591.26 1759,2594 v1(1859,2594) ; v1(3509,1865) WKUP.1@3595,1865 v1(3638,1865)
  Layer 1 w10: v1(3638,1865) 3770,1865 4121.99,2216.99 4121.99,2902.91 4000.77,3024.13 3917.34,3024.13 3858,3083.47 v1(3858,3152.46)
  Bottom Layer w10: v1(1859,2594) 1905,2548 1905,2505 1888,2488 1861,2488 1723,2350 1723,1975 1738,1960 2258,1960 2272,1946 3428,1946 v1(3509,1865) ; J2.42@3740.04,3168.46 3842,3168.46 v1(3858,3152.46)
PA1: J1.3 U1.41 | length 834.9
  Top Layer w10: v1(1671,2572) 1671.43,2571.57 U1.41@1720.91,2571.57
  Bottom Layer w10: v1(1671,2572) 1771,2472 1794,2472 1831.02,2509.02 1831.02,2637.98 1867.56,2674.53 J1.3@2254.96,2674.53
PA3: J1.44 U1.47 | length 1285.5
  Top Layer w10: U1.47@1841.6,2431.2 1841.6,2533.5 1854.6,2546.5 1888.5,2546.5 1902,2560 1902,2662.48 1946.55,2707.03 2096.11,2707.03 2288.31,2899.24 2288.31,2945.67 2496.15,3153.5 v1(2552.5,3153.5)
  Bottom Layer w10: J1.44@2440,3115.47 2514.47,3115.47 v1(2552.5,3153.5)
PA5: J1.46 U1.51 | length 933.2
  Top Layer w10: U1.51@1920.34,2431.2 1920.34,2623.34 1988.03,2691.03 2113.03,2691.03 2344.44,2922.44 2344.44,2955.44 v1(2383,2994)
  Bottom Layer w10: v1(2383,2994) 2383,3035.48 2400,3052.48 J1.46@2440,3052.48
PA7: J1.48 U1.53 | length 1055.6
  Top Layer w10: U1.53@1959.71,2431.2 1959.71,2458.68 1959.57,2458.68 1959.57,2601.74 2016.86,2659.03 2140.99,2659.03 2148.49,2666.53 2227.03,2666.53 2308.61,2748.11 2308.61,2801.85 2381.11,2874.34 2381.11,2929.11 2418,2966 2460,2966 2508,3014 v1(2520,3014)
  Bottom Layer w10: J1.48@2440,2989.49 2495.49,2989.49 v1(2520,3014)
PA9: J1.51 P2.1 U1.120 | length 1993.3
  Top Layer w10: U1.120@2730,3122.76 2657.76,3122.76 2565,3030 2565,2964 v1(2496,2895) 2466.5,2865.5 2466.5,2682.5 2674.5,2474.5 2674.5,2258.5 2714,2219 2998,2219 3031,2186 3031,1986 P2.1@2855,1810
  Bottom Layer w10: J1.51@2440,2895 v1(2496,2895)
PA10: J1.52 P2.2 U1.121 | length 2444.8
  Top Layer w10: U1.121@2730,3142.44 2799.44,3142.44 v1(2831,3174)
  Layer 2 w10: v1(2514.5,2863.5) 2514.5,2816.03 2496.03,2797.56 2480,2797.56 2287.94,2605.5 2219,2605.5 2159.47,2545.98 2127.16,2545.98 2117.19,2536 2117.19,2482.81 2200,2400 2200,2352 2192,2344 2192,2189 2527,1854 2711,1854 P2.2@2755,1810
  Bottom Layer w10: J1.52@2440,2863.5 v1@2509.5,2863.5 ; v1(2514.5,2863.5) v1@2509.5,2863.5 ; v1(2831,3174) 2799,3206 2747,3206 2715,3174 2625,3174 2573,3122 2573,3063.5 2557,3047.5 2557,2911.01 v1@2509.5,2863.5
PA11: J1.53 R11.1 U1.122 | length 1918.9
  Top Layer w10: R11.1@1925,1930 v1(1973,1930) ; v1(2597,3111) 2648.13,3162.13 U1.122@2730,3162.13
  Layer 2 w10: v1(1973,1930) 2046,2003 2046,2477.12 1998.48,2524.64 1998.48,2590.48 2063,2655 2313.96,2655 2383.93,2724.97 2383.93,2735.51 2400,2751.58 2410.54,2751.58 2443.37,2784.41 2443.37,2803.02 2456,2815.65 2474.6,2815.65 v1(2490.96,2832.01)
  Bottom Layer w10: J1.53@2440,2832.01 v1(2490.96,2832.01) 2530,2832.01 2573,2875.01 2573,3014 2597,3038 v1(2597,3111)
PA12: J1.54 R12.1 U1.123 | length 2246
  Top Layer w10: R12.1@1930,2075 v1(1978,2075) ; U1.123@2730,3181.81 v1(2780,3181.81)
  Layer 2 w10: v1(1978,2075) 1968.43,2084.57 1968.43,2786.83 1997.6,2816 2065.6,2816 2095.09,2786.5 2281.5,2786.5 2477,2982 2552,2982 2566,2968 ; v1(2555.51,2800.51) 2566,2811 2566,2968 ; v1(2780,3181.81) 2752.18,3181.81 2705.33,3134.96 2566.96,3134.96 2522,3090 2522,3056 2566,3012 2566,2968
  Bottom Layer w10: J1.54@2440,2800.51 v1(2555.51,2800.51)
PB2: J1.55 U1.58 U6.6 | length 3130.1
  Top Layer w10: U6.6@1631.5,4005 v1(1685,4005) ; U1.58@2058.13,2431.2 2058.13,2493.87 2055,2497 2055,2562.01 2104.02,2611.03 2133.19,2611.03 2156.69,2587.53 2156.69,2537.69 v1(2141,2522)
  Layer 1 w10: v1(1685,4005) 1454,3774 1454,3134 1622.59,2965.41 1711.41,2965.41 1786,3040 1867.71,3040 2107.21,2800.5 2458.52,2800.5 v1(2490,2769.02)
  Layer 2 w10: v1(2141,2522) 2213,2522 2227,2536 2227,2576.5 2240,2589.5 2310.48,2589.5 v1(2490,2769.02)
  Bottom Layer w10: J1.55@2440,2769.02 v1(2490,2769.02)
PB6: J1.24 U1.164 U6.1 | length 2185.5
  Top Layer w10: U6.1@1318.5,4105 v1(1381,4105) ; U1.164@2038.45,3440.29 v1(2038.45,3552.55)
  Layer 1 w10: v1(1381,4105) 1456,4030 1696,4030 1726.43,3999.57 1726.43,3316.57 1744,3299 1802.32,3299 1848.32,3253 v1(2089.87,3253)
  Layer 2 w10: v1(2038.45,3552.55) 2018,3532.11 2018,3305 2070,3253 v1(2089.87,3253)
  Bottom Layer w10: v1(2089.87,3253) 2172.82,3335.95 J1.24@2254.96,3335.95
PB10: J2.2 U1.79 | length 1305.5
  Top Layer w10: U1.79@2471.52,2431.2 v1(2471.52,2497.48)
  Bottom Layer w10: v1(2471.52,2497.48) 2454.9,2514.1 2454.9,2544 2476.9,2566 2563.74,2566 2622.74,2507 2861,2507 2895,2541 3372.46,2541 3464.5,2633.03 J2.2@3555,2633.03
PB11: J2.1 U1.80 | length 1987.8
  Top Layer w10: v1(2484,2374) 2491.2,2381.2 U1.80@2491.2,2431.2
  Layer 1 w10: v1(2484,2374) 2545,2313 3128.5,2313 3249.5,2192 3416,2192 3647.52,2423.52 3760,2423.52 3783.52,2447.04 3783.52,2536.92 3726.94,2593.5 3512.07,2593.5 v1(3504.04,2601.54)
  Bottom Layer w10: v1(3504.04,2601.54) J2.1@3555,2601.54
PB13: J2.5 U1.93 | length 894.1
  Top Layer w10: U1.93@2730,2591.26 2800.48,2591.26 v1(2815.74,2576)
  Bottom Layer w10: v1(2815.74,2576) 2842.74,2603 3150,2603 3274.52,2727.52 J2.5@3555,2727.52
PB14: J2.6 U1.94 | length 1125.1
  Top Layer w10: v1(2630,2584) 2656.94,2610.94 U1.94@2730,2610.94
  Bottom Layer w10: v1(2630,2584) 2646,2600 2798,2600 2819.5,2621.5 2819.5,2649.5 2838,2668 3151.05,2668 3242.06,2759.02 J2.6@3555,2759.02
PB15: J2.7 U1.95 | length 904.7
  Top Layer w10: U1.95@2730,2630.63 v1(2779.63,2630.63)
  Bottom Layer w10: v1(2779.63,2630.63) 2779.63,2653.63 2850.5,2724.5 3057.5,2724.5 3123.51,2790.51 J2.7@3555,2790.51
PC4: J1.49 U1.54 | length 919.3
  Top Layer w10: U1.54@1979.39,2431.2 1979.39,2471.18 1975.57,2475 1975.57,2571.56 2047.05,2643.03 2156.99,2643.03 2164.49,2650.53 2235.32,2650.53 2324.61,2739.82 2324.61,2782.21 2398.92,2856.53 2398.92,2900.92 2448,2950 2483,2950 v1(2491,2958)
  Bottom Layer w10: J1.49@2440,2957.99 v1(2491,2958)
PC5: J1.50 U1.55 | length 880.1
  Top Layer w10: U1.55@1999.08,2431.2 v1(1999.08,2488.08)
  Bottom Layer w10: v1(1999.08,2488.08) 2064,2553 2145,2553 2170,2528 2249,2528 2322,2601 2322,2908.19 2340.3,2926.5 J1.50@2440,2926.5
PC10: J1.40 U1.139 | length 288.8
  Top Layer w10: v1(2499,3355) 2530.57,3386.57 U1.139@2530.57,3440.29
  Bottom Layer w10: J1.40@2440,3241.46 2498.46,3241.46 2521,3264 2521,3333 v1(2499,3355)
PC12: J1.38 U1.141 | length 208.6
  Top Layer w10: U1.141@2491.2,3440.29 2491.2,3395.05 2475.07,3378.92 2475.07,3326.38 v1(2497,3304.45)
  Bottom Layer w10: J1.38@2440,3304.45 v1(2497,3304.45)
PD2: J1.37 U1.144 | length 238.2
  Top Layer w10: v1(2373,3306) 2432.15,3365.15 U1.144@2432.15,3440.29
  Bottom Layer w10: v1(2373,3306) 2402.95,3335.95 J1.37@2440,3335.95
PE2: J1.20 U1.1 | length 730.3
  Top Layer w10: v1(1671,3358.98) U1.1@1720.91,3358.98
  Layer 1 w10: v1(1671,3358.98) 1671,3317.37 1751.37,3237 1855,3237 1872,3220 2145.5,3220 2158,3232.5 2181.5,3232.5 v1(2204,3210)
  Bottom Layer w10: v1(2204,3210) v1(2204,3210) J1.20@2254.96,3209.96
PE3: J1.19 U1.2 | length 823.4
  Top Layer w10: U1.2@1720.91,3339.29 1770.29,3339.29 v1(1771,3340)
  Layer 1 w10: v1(1771,3340) 1946,3340 2020,3414 2112,3414 2113,3328 2129,3312 2212,3312 2228,3296 2228,3198 2208.47,3178.47 v1(2201,3178.47)
  Bottom Layer w10: v1(2201,3178.47) J1.19@2254.96,3178.47
PE4: J1.18 U1.3 | length 806.3
  Top Layer w10: v1(1628,3312) 1635.61,3319.61 U1.3@1720.91,3319.61
  Layer 1 w10: v1(1628,3312) 1772,3168 1800,3168 1818,3186 2146,3186 2185,3147 v1(2204,3147)
  Bottom Layer w10: v1(2204,3147) J1.18@2254.96,3146.97
PE5: J1.17 U1.4 | length 610.9
  Top Layer w10: U1.4@1720.91,3299.92 1748.39,3299.92 1748.97,3300.5 1810.5,3300.5 1811.08,3299.92 v1(1837,3299.92)
  Bottom Layer w10: v1(1837,3299.92) 2021.45,3115.47 J1.17@2254.96,3115.47
PE6: J1.16 U1.5 | length 621
  Top Layer w10: U1.5@1720.91,3280.24 1753,3280.24 1753,3283.92 1763.42,3283.92 1764,3284.5 1785.5,3284.5 1817,3253 2017.98,3253 v1(2187,3083.98)
  Bottom Layer w10: v1(2187,3083.98) J1.16@2254.96,3083.98
PF6: J1.14 U1.24 U6.7 | length 1888.7
  Top Layer w10: U6.7@1631.5,4055 v1(1669,4055) ; U1.24@1720.91,2906.22 1820.78,2906.22 v1(1837,2890)
  Layer 2 w10: v1(1669,4055) 1643,4029 1643,3603.44 1734,3512.44 1734,3195 1837,3092 v1(1837,2890)
  Bottom Layer w10: v1(1837,2890) 1967.99,3020.99 J1.14@2254.96,3020.99
PF7: J1.13 U1.25 U6.3 | length 2144.8
  Top Layer w10: v1(1257,4005) U6.3@1318.5,4005 ; v1(1670.93,2886.54) U1.25@1720.91,2886.54
  Layer 2 w10: v1(1257,4005) 1257,3162 1532.46,2886.54 v1(1670.93,2886.54)
  Bottom Layer w10: v1(1670.93,2886.54) 1690.39,2906 1778,2906 1821,2863 1881.78,2863 2008.27,2989.49 J1.13@2254.96,2989.49
PF8: J1.12 U1.26 U6.5 | length 2158.7
  Top Layer w10: U6.5@1631.5,3955 v1(1701,3955) ; U1.26@1720.91,2866.85 v1(1771,2866.85)
  Layer 2 w10: v1(1701,3955) 1709,3963 1709,4096 1704,4101 1664,4101 1627,4064 1627,3587 1697,3517 1697,2940.85 v1(1771,2866.85)
  Bottom Layer w10: v1(1771,2866.85) 1791.44,2846.41 1898.37,2846.41 2009.95,2957.99 J1.12@2254.96,2957.99
PF9: J1.11 U1.27 U6.2 | length 2304.5
  Top Layer w10: v1(1233,4055) U6.2@1318.5,4055 ; v1(1632.7,2847.17) U1.27@1720.91,2847.17
  Layer 2 w10: v1(1233,4055) 1233,3112.83 1498.67,2847.17 v1(1632.7,2847.17)
  Bottom Layer w10: v1(1632.7,2847.17) 1664.7,2847.17 1693.36,2818.5 1902.46,2818.5 2010.45,2926.5 J1.11@2254.96,2926.5
PG3: J2.13 J3.37 U1.107 | length 2714.1
  Top Layer w10: U1.107@2730,2866.85 2825.23,2866.85 2838.38,2880 v1(2838.38,2922) ; v1(3975,3648) 3977.24,3645.76 J3.37@3977.24,3555.57
  Layer 2 w10: v1(3453,2979) 3604,3130 3604,3299 3686,3381 3686,3595 3747,3656 3800.09,3656 3883.09,3573 3952,3573 3975,3596 v1(3975,3648)
  Bottom Layer w10: v1(2838.38,2922) 2781.63,2922 2762.63,2941 2640,2941 2621,2922 2621,2899 2763.5,2756.5 3004.5,2756.5 3211.37,2963.37 3390.94,2963.37 3407.06,2979.49 v1@3453.49,2979.49 ; v1(3453,2979) v1@3453.49,2979.49 ; J2.13@3555,2979.49 v1@3453.49,2979.49
PG13: J1.33 U1.156 | length 423.7
  Top Layer w10: U1.156@2195.93,3440.29 v1(2195.93,3564.5)
  Bottom Layer w10: v1(2195.93,3564.5) 2319.5,3564.5 2374.14,3509.86 2374.14,3487.79 2400,3461.93 J1.33@2440,3461.93
PG14: J1.32 U1.157 | length 1085.7
  Top Layer w10: v1(2176,3390) 2176.24,3390.24 U1.157@2176.24,3440.29
  Layer 1 w10: v1(2176,3390) 2280,3390 2304,3414 2652,3414 v1(2684,3446)
  Bottom Layer w10: J1.32@2440,3493.43 2478.43,3486 2508,3486 2547,3525 2547,3552 2575,3580 2704,3580 2732,3552 2732,3456 v1(2684,3446)
PH6: J2.8 J3.38 U1.83 | length 3134.8
  Top Layer w10: v1(2550,2481) 2550.26,2480.74 U1.83@2550.26,2431.2 ; J3.38@3996.93,3555.57 3996.93,3528 4004.93,3520 4145,3520 4161,3504 4161,2969 v1(4084,2892)
  Layer 1 w10: v1(3505,2838) 3585,2758 3999,2758 4042.99,2801.99 4042.99,2850.99 v1(4084,2892)
  Bottom Layer w10: v1(2550,2481) 2613.04,2417.96 2731.46,2417.96 2737.5,2424 3461,2424 3656.02,2619.02 3656.02,2643.39 3634.43,2664.98 3634.43,2787.36 3599.79,2822.01 J2.8@3555,2822.01 3520.99,2822.01 v1(3505,2838)
PH7: J2.9 J3.39 U1.84 | length 3327.9
  Top Layer w10: U1.84@2569.94,2431.2 2569.94,2381.06 v1(2570,2381) ; J3.39@4016.61,3555.57 4016.61,3594.68 v1(4017,3595.07)
  Bottom Layer w10: v1(2570,2381) 2590.96,2401.96 2700.04,2401.96 2737,2365 3433,2365 3679,2611 ; v1(4017,3595.07) 4017,3069 4109,2977 4109,2528 4074,2493 3723,2493 3679,2537 3679,2611 ; 3594.5,2842.5 3611,2842.5 3654,2799.5 3654,2691.07 3679,2666.07 3679,2611 ; 3594.5,2842.5 J2.9@3555,2853.5 3583.5,2853.5 3594.5,2842.5
PI3: J2.41 J3.36 U1.134 | length 2259.3
  Top Layer w10: U1.134@2629,3440.29 2629,3496.5 v1(2645,3512.5) ; v1(3922,3445) 3946,3469 3946,3506.44 3957.56,3518 J3.36@3957.56,3555.57
  Layer 1 w10: v1(2645,3512.5) 2645,3541.5 2680,3576.5 2710,3576.5 2761,3525.5 2815.5,3525.5 3021,3320 3363,3320 3562,3121 3645,3121 3779,2987 3802,2987 3814.5,2999.5 3814.5,3177.46 3791.48,3200.48 3817.21,3226.21 3872,3226.21 3883,3237.21 3883,3406 v1(3922,3445)
  Bottom Layer w10: J2.41@3740.04,3199.96 3790.96,3199.96 3791.48,3200.48
PI8: J2.40 J3.35 U1.7 | length 4742.7
  Top Layer w10: v1(1643.5,3240.87) U1.7@1720.91,3240.87 ; J3.35@3937.87,3555.57 v1(3937.87,3596.7) v1(3937.87,3873.13)
  Bottom Layer w10: v1(1643.5,3240.87) 1643.5,3150.13 1632,3138.63 1356.37,3138.63 1295,3200 1295,3872 1330,3907 3904,3907 v1(3937.87,3873.13) ; J2.40@3740.04,3231.46 3788.46,3231.46 3845,3288 3898,3288 3972,3362 3972,3562.57 v1(3937.87,3596.7)
RESET: C12.1 J1.10 J3.40 P1.5 R6.1 RST.1 U1.31 | length 7093.8
  Top Layer w10: v1(1639,2709) 1639,2736 1671.42,2768.42 U1.31@1720.91,2768.42 ; RST.1@3722.91,1845 3790,1912.09 3790,2088 ; R6.1@3790,2134.94 3790,2088 ; v1(3821,4113) 4175,3759 4175,3584 4142,3555 ; C12.1@4002.09,2070 3968,2070 ; J3.40@4036.3,3555.57 4036.3,3555 4142,3555 ; 3790,2088 3808,2070 3968,2070 ; 3968,2070 3960,2062 3960,1783 4000,1743 4119,1743 4177,1801 4177,3520 4142,3555
  Layer 1 w10: P1.5@2615,4055 2673,4113 v1(3821,4113)
  Layer 2 w10: v1(2204,2887) 2272,2955 2272,3397 2394.5,3519.5 2394.5,3590.5 2472,3668 2478,3668 2615,3805 P1.5@2615,4055
  Bottom Layer w10: v1(1639,2709) 1639,2736 1658.5,2755.5 1829.98,2755.5 1876.98,2802.5 1918.46,2802.5 2010.96,2895 v1@2212,2895 ; v1(2204,2887) v1@2212,2895 ; J1.10@2254.96,2895 v1@2212,2895
VBAT: D1.2 J1.29 | length 953.8
  Top Layer w10: v1(1477.6,3695) D1.2@1477.6,3731.26
  Bottom Layer w10: v1(1477.6,3695) 1477.6,3598.3 1561.89,3514 2180,3514 2200.57,3493.43 J1.29@2254.96,3493.43
VCC: R16.2 R20.2 R21.2 | length 2387.1
  Top Layer w10: R21.2@2625,3615 2625,3665 2635,3675 R20.2@2635,3725 2594,3725 2594,3905 2665,3976 v1(2665,4007) ; R16.2@4125,3445 v1(4125,3493)
  Layer 1 w10: v1(2665,4007) 2665,4067 2694,4096 3594,4096 3998,3692 4081,3692 4125,3648 v1(4125,3493)
VCC3.3: 3.3V.1 C31.2 C32.2 C37.2 C38.2 C39.2 C40.2 C41.2 C42.2 C43.2 C44.1 C45.1 MOS1.2 P1.4 R6.2 R8.1 R9.1 R17.1 R18.2 R19.1 U2.5 U3.1 U3.3 U3.9 U3.14 U3.27 U3.43 U3.49 U5.8 U6.8 WKUP.2 | length 15285.7
  Top Layer w10: 3.3V.1@1335,3500 1406,3571 1406,3795.94 1440,3829.94 R9.1@1475,3829.94 1475,3856 ; U2.5@2265,1729.8 2296,1729.8 ; R8.1@2310,2140 2310,2029 2329,2010 2419,2010 2445,1984 C31.2@2445,1940 ; v1(2346,1729.8) 2296,1729.8 ; v1(2501,3990) v1@2496,3990 ; C32.2@2545,1930 2500,1930 2490,1940 C31.2@2445,1940 ; C45.1@2545,3840 2545,3941 v1@2496,3990 ; P1.4@2715,4055 2756,4096 2940,4096 2956,4080 2956,3813 2944,3801 2779.06,3801 2779.06,3652.94 2912,3520 R17.1@2975,3520 ; R18.2@3095,3035 3095,2990 3120,2965 ; v1(3169.9,2125) 3152.4,2142.5 MOS1.2@3152.4,2170.79 3152.4,2216.64 3159.72,2223.96 3159.72,2628 3223.07,2691.35 U3.27@3223.07,2762.44 3223.07,2805 3104,2805 3095,2814 C39.2@3095,2845 3095,2940 3120,2965 ; v1(3229,1865) WKUP.2@3278,1865 ; R19.1@3374.94,2965 3120,2965 ; v1(3497.5,2125) C38.2@3450,2125 3450,1920 3395,1865 WKUP.2@3287.91,1865 WKUP.2@3278,1865 ; U3.14@3632.52,2762.44 3632.52,2888.98 3616,2905.5 3555,2905.5 C40.2@3555,2875 3528,2875 3519,2884 3519,3002 3528,3011 3674.77,3011 3710.77,2975 C41.2@3740.04,2975 3802,2975 3812,2965 C42.2@3875,2965 3875,3000 3948.5,3000 3978.5,2970 C43.2@4015.06,2970 4042,2970 4052,2960 4052,2836.03 4041.97,2826 U3.1@4041.97,2762.44 4041.97,2713 4032.97,2704 3996.48,2704 3989.5,2710.98 ; v1(3707.03,2135) C37.2@3659.53,2135 3695.51,2139.51 U3.43@3695.51,2290 3695.51,2332.51 3712,2349 3751,2349 3802,2400 3802,2594 3818,2610 3818,2692 ; U3.9@3790,2762.44 3790,2720 3818,2692 ; R6.2@3880,2134.94 3880,2241 3884.49,2245.49 U3.49@3884.49,2290 3884.49,2362 ; 1475,3856 1353,3978 1292,3978 1282,3968 1282,1664 1331,1615 3028,1615 WKUP.2@3278,1865 ; 1475,3856 1575,3956 1575,4080 1600,4105 U6.8@1631.5,4105 1779,4105 1819,4065 C44.1@1925,4065 2323,4065 2398,3990 U5.8@2435,3990 v1@2496,3990 ; 2296,1729.8 2309,1742.8 2309,1888 2320,1899 2445,1899 C31.2@2445,1940 ; 3818,2692 3859.82,2650.18 3888.39,2650.18 3892.5,2646.08 3892.5,2590.51 3884.49,2582.5 3884.49,2362 ; 3884.49,2362 3989.5,2467.01 3989.5,2710.98 ; 3989.5,2710.98 3978.98,2721.5 U3.3@3978.98,2762.44 3989.5,2710.98
  Layer 1 w10: v1(2346,1729.8) 2481.2,1865 v1(3229,1865) ; v1(2501,3990) 2507.5,3983.5 2680,3983.5 2715,4018.5 P1.4@2715,4055 ; v1(3169.9,2125) v1(3497.5,2125) 3697.03,2125 v1(3707.03,2135)
VCC3.3M: C13.2 C14.2 C15.2 C16.2 C17.2 C18.2 C19.2 C20.2 C21.2 C22.2 C23.2 C24.2 C25.2 C26.2 C27.2 D1.1 R3.2 R5.2 R8.2 R9.2 U1.15 U1.23 U1.36 U1.49 U1.62 U1.72 U1.82 U1.91 U1.103 U1.114 U1.127 U1.136 U1.149 U1.159 U1.172 | length 15436.1
  Top Layer w10: v1(1339.94,2163) R3.2@1339.94,2340 ; C13.2@1554.94,3254.94 1554.94,3281.94 1686,3413 1686,3691 ; C14.2@1560,3150 1560,3123.39 v1@1594.19,3089.19 ; C15.2@1575,2810 1575,2832.3 1603.3,2832.3 1603.3,2908.44 1620.03,2925.17 1620.79,2925.21 1636.03,2925.91 ; v1(1588,3083) v1@1594.19,3089.19 ; v1(1620.03,2941.91) 1636.03,2925.91 ; U1.36@1720.91,2670 v1(1789.78,2670) ; U1.23@1720.91,2925.91 1636.03,2925.91 ; U1.15@1720.91,3083.39 v1(1612,3083.39) 1600,3083.39 v1@1594.19,3089.19 ; R5.2@1770,3810 1696.94,3810 1677,3829.94 R9.2@1565,3829.94 1565,3786.6 1552.4,3774 D1.1@1552.4,3731.26 1571,3731.26 1611.26,3691 1686,3691 ; v1(1848,1775) C27.2@1895,1775 v1(1895,1823) ; U1.49@1880.97,2431.2 v1(1880.97,2516.08) ; U1.172@1880.97,3440.29 1880.97,3530.97 ; v1(1913,3563) 1880.97,3530.97 ; v1(1913,3605) 1880.97,3572.97 ; U1.62@2136.87,2431.2 2136.87,2396 2146,2386.87 2146,2325 C16.2@2160,2325 2170,2325 v1(2216,2279) ; v1(2136.87,3347) U1.159@2136.87,3440.29 ; v1(2216,2230) R8.2@2310,2230 2336,2230 2357,2251 2357,2324 2368,2335 C17.2@2389,2335 ; U1.72@2333.72,2431.2 2333.72,2390.28 C17.2@2389,2335 ; v1(2333.72,3390.31) U1.149@2333.72,3440.29 ; C17.2@2405,2335 C17.2@2389,2335 ; U1.82@2530.57,2431.2 2530.57,2347.51 2530.06,2347 C18.2@2530.06,2265 2580,2265 2585,2260 C19.2@2635,2260 2635,2224 2648,2211 2674,2211 2693,2192 v1(2693,2008) ; v1(2574,3541) 2589.63,3525.37 U1.136@2589.63,3440.29 2589.63,3408 2593,3408 2593,3398 2594,3397 2594,3376 2552,3334 2552,3275 2572.21,3254.79 2681.24,3254.79 2687,3260.55 U1.127@2730,3260.55 v1(2779.98,3260.55) ; U1.91@2730,2551.89 2826.13,2551.89 2839.24,2565 C20.2@2870,2565 2870,2635 2875,2640 C21.2@2875,2710.06 2875,2783.62 ; U1.103@2730,2788.11 2779.98,2788.11 2796.11,2804.24 2854.38,2804.24 2875,2783.62 ; U1.114@2730,3004.65 2763.35,3004.65 2790,2978 2816,2978 2840,3002 ; v1(2797.5,3374.06) 2813.5,3390.06 C23.2@2845,3390.06 ; C24.2@2920,3850 C25.2@2815.06,3850 2789,3850 2763.06,3824.06 2763.06,3624.94 2845,3543 C23.2@2845,3390.06 ; C26.2@3110,2685 3076,2685 2964,2797 2964,2947 2944,2967 2896,2967 2875,2946 ; 1686,3691 1723,3691 1782,3632 1877,3632 1880.97,3628.03 1880.97,3572.97 ; 1880.97,3530.97 1880.97,3572.97 ; 2840,3002 C22.2@2840,3050 2873,3050 2887,3064 2887,3390.06 C23.2@2845,3390.06 ; 2840,3002 2840,2981 2875,2946 ; 2875,2783.62 2875,2946
  Layer 1 w10: v1(1339.94,2163) 2176,2163 2216,2203 ; v1(2136.87,3347) 2152.87,3363 2306.41,3363 v1(2333.72,3390.31) ; v1(2216,2279) v1(2216,2230) 2216,2203 ; v1(2693,2008) 2483,2008 2298,1823 v1(1895,1823) 1895,1952 1933,1990 2034,1990 2216,2172 2216,2203
  Layer 2 w10: v1(1612,3083.39) 1607.5,3078.89 1607.5,2954.44 v1(1620.03,2941.91) ; v1(1789.78,2670) 1835,2624.78 1835,2562 1880.97,2562 v1(1880.97,2516.08) 1897,2532.11 1897,3547 v1(1913,3563) ; v1(1913,3605) 2040,3605 ; v1(2136.87,3347) 2117,3366.87 2117,3498 2093,3522 2093,3552 2040,3605 ; v1(2216,2230) v1(2216,2279) ; v1(2574,3541) 2640,3607 2640,4022.68 2655.53,4038.21 2655.53,4079 2639,4095.53 2592,4095.53 2527.47,4031 2366,4031 2101,3766 2101,3648 2058,3605 2040,3605 ; v1(2779.98,3260.55) 2804,3284.57 2804,3367.56 v1(2797.5,3374.06)
  Bottom Layer w10: v1(1588,3083) 1588,2151 1623,2116 ; v1(1789.78,2670) 1697,2670 1623,2596 1623,2116 ; v1(1848,1775) 1800,1823 ; v1(1895,1823) 1800,1823 ; 1623,2116 1703,2036 1703,1920 1800,1823 ; 1623,2116 1623,1903 1703,1823 1800,1823
VCC5: 5V.1 C33.1 F1.1 J1.58 J1.59 J1.60 J3.2 USB.1 | length 5786.2
  Top Layer w10: v1(1335,3639) 5V.1@1335,3680 v1(1335,3731) ; USB.1@1624,2021.18 1648,2021.18 1648,2144 1694,2190 v1(1747,2190) C33.1@1840,2190 ; v1(1840,2254.5) C33.1@1840,2190 ; F1.1@2088.23,1925 2088.23,1876 1904,1876 1881,1899 1881,2181 1872,2190 C33.1@1840,2190 ; v1(2922,3705) 3071,3556 3216,3556 3252,3520 3280.27,3520 3288.27,3528 J3.2@3288.27,3555.57
  Layer 2 w10: v1(1335,3639) 1335,3406 1636,3105 1636,3040.65 1623.5,3028.15 1623.5,2972.5 1719,2877 1719,2218 v1(1747,2190)
  Bottom Layer w10: v1(1335,3731) 1417,3813 2814,3813 v1(2922,3705) ; v1(1840,2254.5) 2114.65,2254.5 2201.65,2341.5 2282.95,2341.5 2315,2373.55 2315,2542.5 2384.04,2611.54 J1.60@2440,2611.54 J1.59@2440,2643.03 J1.58@2440,2674.53
VCC_LED: C34.1 MOS1.3 R10.1 R15.2 | length 1166.3
  Top Layer w10: R15.2@2750,2260 2750,2297 2760,2307 3014.21,2307 3052,2269.21 MOS1.3@3115,2269.21 ; C34.1@2960,2440 3075,2440 3115,2400 MOS1.3@3115,2269.21 ; R10.1@3180,1860 3180,2027 3107.68,2099.32 3107.68,2209.17 3115,2216.49 MOS1.3@3115,2269.21
VDDA: C6.2 C7.2 R2.2 R3.1 U1.39 | length 706.8
  Top Layer w10: R3.1@1339.94,2430 1536,2430 1575,2391 ; C6.2@1590,2265 1590,2307 1575,2322 C7.2@1575,2365 1575,2391 ; U1.39@1720.91,2610.94 1647.45,2610.94 1575,2538.49 R2.2@1575,2475 1575,2391
VREF+: J1.2 R13.1 | length 1396
  Top Layer w10: v1(2855,2123) R13.1@2855,2170
  Layer 1 w10: v1(2204,2627) 2085,2627 2050,2592 2050,2381 2074,2357 2240,2357 2474,2123 v1(2855,2123)
  Bottom Layer w10: v1(2204,2627) 2220.03,2643.03 J1.2@2254.96,2643.03
pads on no net: U3.40 U4.1 U4.2 U4.3 U4.4 U4.5 U4.6 U4.10 U4.11 U4.14 U4.15 U4.20 U4.21 U4.22 U4.23 U4.24 U4.25 U4.26 U4.27 U4.28 U4.33 U4.34 U4.35 U4.38 U4.39 U4.40 U4.45 U4.46 U4.47 U4.48 U6.9 USB.4

## Text inside footprints (layer, text, board x,y; h text height)
J3: Top Overlay "1" at 3264.58,3496.57 h30; Top Overlay "40" at 4012.58,3492.57 h30